# Altium PCB Master_V1.PcbDoc
Units mil, origin at the board's own origin, x right, y up, seen from the top; angles counter-clockwise.
Board outline 6000 x 4000 mil, 2 copper layers (Top Layer, Bottom Layer); 172 components, 130 nets, 630 pads, 0 vias.
Unrouted connection lines stored in the file: 409.
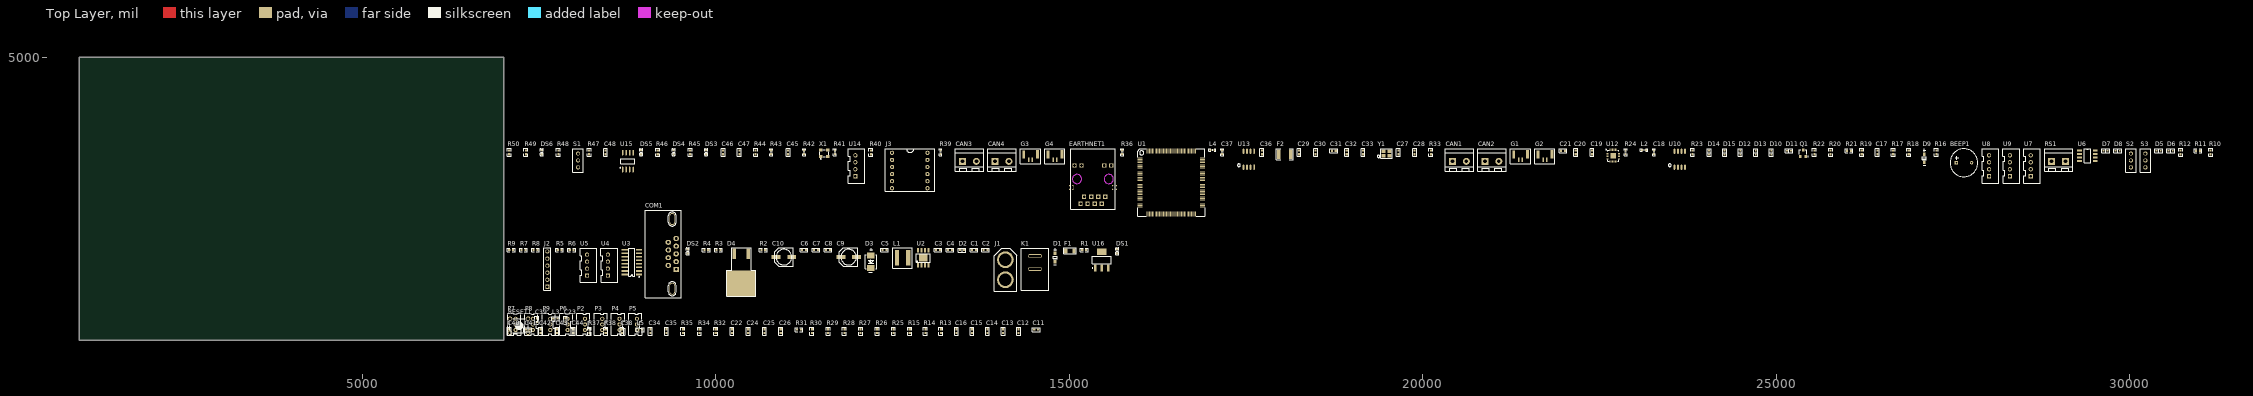
[diagram p0: Top Layer view]
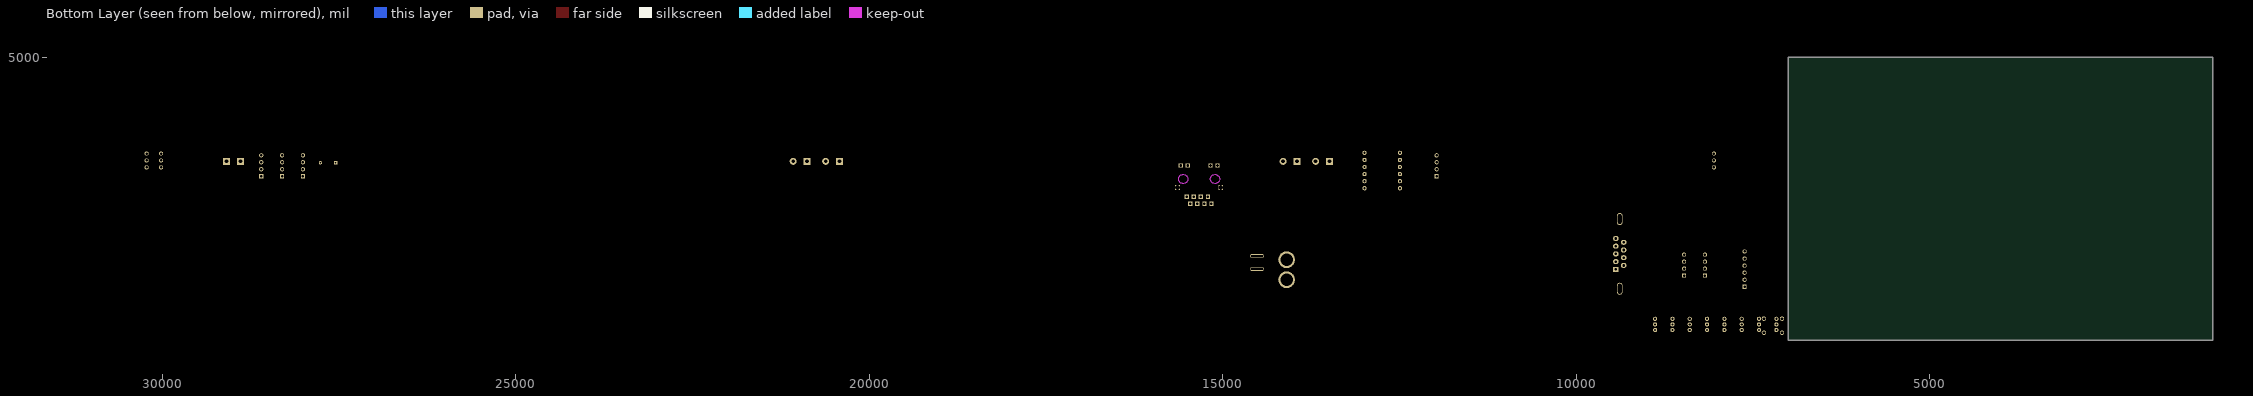
[diagram p1: Bottom Layer view, seen from below]

## Layer stack, top to bottom
Top Solder: solder mask 0.4, Solder Resist, Dk 3.5
Top Layer: signal copper 1.4
Dielectric 1: dielectric 12.6, FR-4, Dk 4.8
Bottom Layer: signal copper 1.4
Bottom Solder: solder mask 0.4, Solder Resist, Dk 3.5

## Board outline
1000,1000 7000,1000 7000,5000 1000,5000

## Design rules (kind name [scope] priority, off if disabled: settings)
Clearance [All] p1: gap=10 ignorepadtopadclearanceinfootprint=FALSE except(0: Arc-Hole Track-Hole SMDPad-Hole THPad-Hole Via-Hole Fill-Hole Poly-Hole Region-Hole Text-Hole)
PolygonConnect [All] p1: connectstyle=Relief reliefconductorwidth=10 reliefentries=4 polygonreliefangle="90 Angle" airgapwidth=10
RoutingVias [All] p1: holewidth=28 width=50 viastyle="Through Hole" minholewidth=28 minwidth=50 maxholewidth=28 maxwidth=50
SolderMaskExpansion [All] p1: expansion=4
Width [All] p1: maxlimit=10 minlimit=10 preferedwidth=10
30 further rules are at their usual default settings.

## Components (designator, comment, footprint, x,y, rotation, side; value= is the part's Value field where it differs from the comment)
BEEP1 "BEEP" BELL-5 27655,3510 r0 top
C1 "106" 0603C 13625,2275 r0 top
C2 "104" 0603C 13790,2275 r0 top
C3 "104" 0603C 13115,2275 r0 top
C4 "106" 0603C 13285,2275 r0 top
C5 "10nF" 0603C 12360,2275 r0 top
C6 "22uF" 0603C 11220,2275 r0 top
C7 "22uF" 0603C 11390,2275 r0 top
C8 "104" 0603C 11560,2275 r0 top
C9 "220uF" CC6.56.5 11880,2175 r0 top
C10 "220uF" CC6.56.5 10965,2175 r0 top
C11 "104pF" C0603 14505,1150 r0 top
C12 "104pF" C0603 14285,1100 r90 top
C13 "104pF" C0603 14065,1100 r90 top
C14 "104pF" C0603 13845,1100 r90 top
C15 "104pF" C0603 13625,1100 r90 top
C16 "104pF" C0603 13405,1100 r90 top
C17 "106" 0603C 26430,3630 r90 top
C18 "104" 0603P 23270,3660 r90 top
C19 "2.2uF 225M" 0603C 22395,3630 r90 top
C20 "104" 0603C 22165,3630 r90 top
C21 "2.2uF 225M" 0603C 21955,3680 r0 top
C22 "104pF" C0603 10230,1100 r90 top
C23 "10uF" 0603C 7875,1255 r90 top
C24 "104pF" C0603 10460,1100 r90 top
C25 "104pF" C0603 10690,1100 r90 top
C26 "104pF" C0603 10920,1100 r90 top
C27 "104" 0603C 19655,3630 r90 top
C28 "10uF" 0603C 19885,3630 r90 top
C29 "104" 0603C 18250,3630 r90 top
C30 "104" 0603C 18485,3630 r90 top
C31 "104" 0603C 18715,3680 r0 top
C32 "104" 0603C 18925,3630 r90 top
C33 "104" 0603C 19155,3630 r90 top
C34 "22pF" C0603 9075,1100 r90 top
C35 "22pF" C0603 9305,1100 r90 top
C36 "104" 0603C 17725,3630 r90 top
C37 "104" 0603P 17165,3660 r90 top
C38 "104pF" C0603 8675,1100 r90 top
C39 "10uF" 0603C 7470,1255 r90 top
C40 "223pF" C0603 7080,1100 r90 top
C41 "10pF" C0603 7315,1150 r0 top
C42 "10pF" C0603 7525,1100 r90 top
C43 "10pF" C0603 7755,1100 r90 top
C44 "10pF" C0603 7985,1100 r90 top
C45 "104" 0603C 11025,3630 r90 top
C46 "22pF" 0603C 10105,3630 r90 top
C47 "22pF" 0603C 10335,3630 r90 top
C48 "104" 0603C 8440,3630 r90 top
CAN1 "CAN" HEAD2L-0.8#1 20420,3530 r0 top
CAN2 "CAN" HEAD2L-0.8#1 20880,3530 r0 top
CAN3 "CAN" HEAD2L-0.8#1 13490,3530 r0 top
CAN4 "CAN" HEAD2L-0.8#1 13950,3530 r0 top
COM1 "USART_F(母头)" DB9 9440,2221 r90 top
D1 "RB161MM-20TR" LC-SOD-123F 14800,2170 r90 top
D2 "PESD5V0S1BB" LC-SOD-523 13485,2275 r0 top
D3 "SR54L" LC-SMB(DO-214AA)_S2 12195,2110 r90 top
D4 "STPS30M60S" STPS30M60S 10460,2225 r90 top
D5 "PESD5V0S1BB" LC-SOD-523 30410,3680 r0 top
D6 "PESD5V0S1BB" LC-SOD-523 30580,3680 r0 top
D7 "PESD5V0S1BB" LC-SOD-523 29660,3680 r0 top
D8 "PESD5V0S1BB" LC-SOD-523 29830,3680 r0 top
D9 "RB161MM-20TR" LC-SOD-123F 27095,3575 r90 top
D10 "PESD5V0S1BB" LC-SOD-523 24930,3655 r90 top
D11 "PESD5V0S1BB" LC-SOD-523 25180,3680 r0 top
D12 "PESD5V0S1BB" LC-SOD-523 24490,3655 r90 top
D13 "PESD5V0S1BB" LC-SOD-523 24710,3655 r90 top
D14 "PESD5V0S1BB" LC-SOD-523 24050,3655 r90 top
D15 "PESD5V0S1BB" LC-SOD-523 24270,3655 r90 top
DS1 "LED1" 0603_LED 15680,2255 r90 top
DS2 "LED0" 0603_LED 9605,2255 r90 top
DS3 "LED2" 0603_LED 9865,3660 r90 top
DS4 "LED0" 0603_LED 9405,3660 r90 top
DS5 "LED1" 0603_LED 8945,3660 r90 top
DS6 "LED2" 0603_LED 7540,3660 r90 top
EARTHNET1 "RJ45" HR911105A 15335,3280 r0 top
F1 "1A_6V_Fuse" LC-1206 15010,2265 r0 top
F2 "0.3A 60VPTC FUSE" LC-1812_R 18050,3630 r0 top
G1 "CAN-GH1.25" GH1.25_1*2_lishi 21285,3695 r0 top
G2 "CAN-GH1.25" GH1.25_1*2_lishi 21630,3695 r0 top
G3 "CAN-GH1.25" GH1.25_1*2_lishi 14355,3695 r0 top
G4 "CAN-GH1.25" GH1.25_1*2_lishi 14700,3695 r0 top
J1 "XT60" XT60-ĸͷ 13940,1690 r0 top
J2 "PS2接收器" HDR1X6 7620,1755 r90 top
J3 "JY901" JY901 12495,3650 r0 top
K1 "KEY10*15mm" 10*15mm船型开关 14515,2005 r90 top
L1 "XAL6060-103MEB" XAL6060-103MEB 12565,2165 r0 top
L2 "220R,2.0A,0.05DCR" 0603P 23130,3690 r0 top
L3 "220R,2.0A,0.05DCR" 0603C 7705,1305 r0 top
L4 "220R,2.0A,0.05DCR" 0603P 17025,3690 r0 top
L5 "220R,2.0A,0.05DCR" R0603 8905,1150 r0 top
P2 "PH2.0-3P" PH2.0-3 8150,1145 r90 top
P3 "PH2.0-3P" PH2.0-3 8395,1145 r90 top
P4 "PH2.0-3P" PH2.0-3 8640,1145 r90 top
P5 "PH2.0-3P" PH2.0-3 8885,1145 r90 top
P6 "PH2.0-3P" PH2.0-3 7905,1145 r90 top
P7 "PH2.0-3P" PH2.0-3 7170,1145 r90 top
P8 "PH2.0-3P" PH2.0-3 7415,1145 r90 top
P9 "PH2.0-3P" PH2.0-3 7660,1145 r90 top
Q1 "S8050" SOT-23R 25380,3640 r0 top
R1 "470R" 0603R 15185,2275 r0 top
R2 "1K" 0603R 10645,2275 r0 top
R3 "10K" 0603R 10010,2275 r0 top
R4 "3.24K" 0603R 9840,2275 r0 top
R5 "2.7K" 0603R 7765,2275 r0 top
R6 "2.7k" 0603R 7935,2275 r0 top
R7 "2.7K" 0603R 7255,2275 r0 top
R8 "2.7k" 0603R 7425,2275 r0 top
R9 "100R" 0603R 7080,2275 r0 top
R10 "100R" 0603R 31145,3630 r90 top
R11 "100R" 0603R 30940,3680 r0 top
R12 "100R" 0603R 30720,3630 r90 top
R13 "360R" R0603 13185,1100 r90 top
R14 "360R" R0603 12965,1100 r90 top
R15 "120R" R0603 12745,1100 r90 top
R16 "0603_100R" 0603R 27265,3630 r90 top
R17 "0603_100R" 0603R 26655,3630 r90 top
R18 "0603_100R" 0603R 26875,3630 r90 top
R19 "0603_100R" 0603R 26210,3630 r90 top
R20 "0603_100R" 0603R 25770,3630 r90 top
R21 "1K" 0603R 26000,3680 r0 top
R22 "0603_100R" 0603R 25540,3630 r90 top
R23 "10K" 0603R 23815,3630 r90 top
R24 "120R" 0603P 22870,3660 r90 top
R25 "510R" R0603 12515,1100 r90 top
R26 "49.9R" R0603 12285,1100 r90 top
R27 "49.9R" R0603 12050,1100 r90 top
R28 "49.9R" R0603 11820,1100 r90 top
R29 "49.9R" R0603 11590,1100 r90 top
R30 "10K" R0603 11360,1100 r90 top
R31 "10K" R0603 11150,1150 r0 top
R32 "10K" R0603 10000,1100 r90 top
R33 "10R" 0603R 20115,3630 r90 top
R34 "12.1K" R0603 9770,1100 r90 top
R35 "1M" R0603 9535,1100 r90 top
R36 "120R" 0603P 15750,3660 r90 top
R37 "510R" R0603 8215,1100 r90 top
R38 "510R" R0603 8445,1100 r90 top
R39 "4.7K" 0603P 13180,3660 r90 top
R40 "10K" 0603R 12195,3630 r90 top
R41 "4.7K" 0603P 11685,3660 r90 top
R42 "100R" 0603P 11250,3660 r90 top
R43 "100R" 0603P 10785,3660 r90 top
R44 "1M" 0603R 10565,3630 r90 top
R45 "1K" 0603R 9640,3630 r90 top
R46 "470R" 0603R 9180,3630 r90 top
R47 "470R" 0603R 8210,3630 r90 top
R48 "10K" 0603R 7775,3630 r90 top
R49 "10K" 0603R 7315,3630 r90 top
R50 "470R" 0603R 7080,3630 r90 top
RESET1 "KEY_M" KEY_M 7090,1305 r0 top
RS1 "RS485" HEAD2L-0.8#2 28895,3530 r0 top
S1 "SS-12D00开关" SS-12D00 8125,3375 r90 top
S2 "SS-12D00开关" SS-12D00 30090,3375 r90 top
S3 "SS-12D00开关" SS-12D00 30295,3375 r90 top
U1 "STM32F407ZGT6" lQFP144 16000,3575 r0 top
U2 "TPS5450DDAR" TPS5450 12860,2060 r0 top
U3 "SP3232" SOP16M 8815,2105 r90 top
U4 "IIC" XH2.54-4 8475,1915 r90 top
U5 "IIC" XH2.54-4 8180,1915 r90 top
U6 "SP3485" SOP-8 29290,3685 r0 top
U7 "串口通信" XH2.54-4 28600,3320 r90 top
U8 "串口通信" XH2.54-4 28010,3320 r90 top
U9 "串口通信" XH2.54-4 28305,3320 r90 top
U10 "TJA1050" SOP8 23635,3560 r0 top
U12 "LAN8720A" QFN25 22695,3610 r0 top
U13 "TJA1050" SOP8 17540,3560 r0 top
U14 "HEADER" XH2.54-4 11975,3320 r90 top
U15 "W25Q128" SOIC-8 8760,3530 r0 top
U16 "AMS1117-3.3" SOT223 15460,2135 r0 top
X1 "8M" "XTAL3225   无源" 11535,3645 r0 top
Y1 "25MHz" SMD-3225 19445,3675 r0 top

## Footprints (in the part's own frame and the unit in brackets; to place one, negate y for a bottom-side part, rotate by r counter-clockwise, add the part's x,y. Pads: shape width x height; smd on the part's side, far side on the other; paste and mask are expansions set on the pad)
10*15mm船型开关 [mm]
  oval 1.3x5 hole 0.5 slot 4.5 at 90 deg: 1(0,0) 2(4.75,0)
  silkscreen extent -7.5,-5 7.5,5
0603_LED [mil]
  rect 30x30 smd: 1(-29,0) 2(31,0)
  silkscreen extent -49,-20 51,20, body extent -40,-25 40,25, height 43
0603C [mil]
  rect 30x30 smd: 1(0,0) 2(55,0)
  silkscreen extent -27,-27 82,27, body extent -4,-16 59,16, height 12
0603P [mil]
  rect 30x30 smd: 1(-27,0) 2(27.5,-0.06)
  silkscreen extent -50,-20 50,20
0603R [mil]
  rect 30x30 smd: 1(0,0) 2(55,0)
  silkscreen extent -27,-27 82,27, body extent -4,-18 58,16, height 18
BELL-5 [mm]
  rect 1.2x1.2 hole 0.7: 1(-2.75,0)
  round 1.2 hole 0.7: 2(2.75,0)
  silkscreen extent -5,-5 5,5
C0603 [mil]
  rect 30x30 smd: 1(0,0) 2(55,0)
  silkscreen extent -27,-27 82,27, body extent -4,-16 59,16, height 12
CC6.56.5 [mm] "SMD;W:6.5mm;L:6.5mm;"
  rect 3.2x1.5 smd: 1(-2.794,0) 2(2.8,0)
  silkscreen extent -3.3,-3.3 3.3,3.3
DB9 [mil]
  oval 170x80 hole 50 slot 140 at 0 deg: 0(-493,55) 0(493,55)
  rect 70x80 hole 38: 1(-218,0)
  oval 70x80 hole 38: 2(-109,0) 3(0,0) 4(109,0) 5(218,0) 6(-163,110) 7(-54,110) 8(55,110) 9(164,110)
  silkscreen extent -618,-70 618,440
GH1.25_1*2_lishi [mm]
  rect 0.5x1.6 smd: 1(1.88,-3.683) 2(3.13,-3.683)
  rect 1x3 smd: ""(0.025,-1.753) ""(5.004,-1.676)
  silkscreen extent -1.14,-5.08 6.1,0.38
HDR1X6 [mm] "Connector; Header; 6 Position"
  rect 1.5x1.5 hole 0.9: 1(0,0)
  round 1.5 hole 0.9: 2(2.54,0) 3(5.08,0) 4(7.62,0) 5(10.16,0) 6(12.7,0)
  silkscreen extent -1.27,-1.27 13.97,1.27, body extent -1.27,-1.27 13.97,1.27, height 7.58
HEAD2L-0.8#1 [mm]
  rect 2.5x2.5 hole 1.35: 1(0,0)
  round 2.5 hole 1.35: 2(5,0)
  silkscreen extent -2.54,-3.56 7.62,4.44
HEAD2L-0.8#2 [mm] "10.16mm*10.16mm,pin:5.08mm"
  rect 2.5x2.5 hole 1.35: 1(0,0) 2(5,0)
  silkscreen extent -2.54,-3.56 7.62,4.44
HR911105A [mm] "NET_WORK"
  rect 1.524x1.524 hole 0.889: 1(4.45,-6.35) 2(3.18,-8.89) 3(1.91,-6.35) 4(0.64,-8.89) 5(-0.63,-6.35) 6(-1.9,-8.89) 7(-3.17,-6.35) 8(-4.44,-8.89)
  rect 1.5x1.5 hole 1.02: 9(6.6,4.9) 10(4.064,4.9) 11(-4.064,4.9) 12(-6.6,4.9)
  rect 1.7x1.7 hole 1.65: 13(7.75,-3.048) 14(-7.75,-3.048)
  Keep-Out Layer circle w0.051: c5.716,0 r1.65
  Keep-Out Layer circle w0.051: c-5.714,0 r1.65
  silkscreen extent -8,-10.92 8,10.92
JY901 [mil]
  round 60 hole 32: 1(0,0) 2(0,-100) 3(0,-200) 4(0,-300) 5(0,-400) 6(0,-500) 7(500,-500) 8(500,-400) 9(500,-300) 10(500,-200) 11(500,-100) 12(500,0)
  silkscreen extent -95,-545 605,55
KEY_M [mil]
  round 62 hole 38: 1(0,0) 1(255.91,0) 2(0,-200) 2(255.91,-200)
  silkscreen extent 0,-200 255,0
LC-1206 [mm]
  rect 1.13x1.8 smd: 1(-1.49,0) 2(1.49,0)
  silkscreen extent -2.29,-1.09 2.29,1.04
LC-1812_R [mm]
  rect 1.2x3.42 smd: 1(-2.15,0) 2(2.15,0)
  silkscreen extent -3.05,-2.01 3.05,2.01, body extent -2.25,-1.6 2.25,1.6, height 0.59
LC-SMB(DO-214AA)_S2 [mil]
  rect 85x107.99 smd: 1(87.01,0) 2(-87.01,0)
  silkscreen extent -149,-83 193,83
LC-SOD-123F [mm]
  rect 1.25x1 smd: 1(1.475,0) 2(-1.475,0)
  silkscreen extent -2.59,-0.7 3.35,0.7, body extent -1.9,-0.85 1.85,0.85, height 1.2
LC-SOD-523 [mm]
  rect 0.7x0.64 smd: 1(0.73,0) 2(-0.73,0)
  silkscreen extent -1.4,-0.74 1.4,0.71, body extent -0.8,-0.4 0.8,0.4, height 0.7
lQFP144 [mil]
  rect 70.87x10 smd: 1(-0.35,0.02) 2(-0.35,-19.66) 3(-0.35,-39.35) 4(-0.35,-59.03) 5(-0.35,-78.72) 6(-0.35,-98.4) 7(-0.35,-118.09) 8(-0.35,-137.77) 9(-0.35,-157.46) 10(-0.35,-177.14) 11(-0.35,-196.83) 12(-0.35,-216.51) 13(-0.35,-236.2) 14(-0.35,-255.88) 15(-0.35,-275.57) 16(-0.35,-295.25) 17(-0.35,-314.94) 18(-0.35,-334.62) 19(-0.35,-354.31) 20(-0.35,-373.99) 21(-0.35,-393.68) 22(-0.35,-413.36) 23(-0.35,-433.05) 24(-0.35,-452.73) 25(-0.35,-472.42) 26(-0.35,-492.1) 27(-0.35,-511.79) 28(-0.35,-531.47) 29(-0.35,-551.16) 30(-0.35,-570.84) 31(-0.35,-590.53) 32(-0.35,-610.21) 33(-0.35,-629.9) 34(-0.35,-649.58) 35(-0.35,-669.27) 36(-0.35,-688.95) 73(885.47,-688.95) 74(885.47,-669.27) 75(885.47,-649.58) 76(885.47,-629.9) 77(885.47,-610.21) 78(885.47,-590.53) 79(885.47,-570.84) 80(885.47,-551.16) 81(885.47,-531.47) 82(885.47,-511.79) 83(885.47,-492.1) 84(885.47,-472.42) 85(885.47,-452.73) 86(885.47,-433.05) 87(885.47,-413.36) 88(885.47,-393.68) 89(885.47,-373.99) 90(885.47,-354.31) 91(885.47,-334.62) 92(885.47,-314.94) 93(885.47,-295.25) 94(885.47,-275.57) 95(885.47,-255.88) 96(885.47,-236.2) 97(885.47,-216.51) 98(885.47,-196.83) 99(885.47,-177.14) 100(885.47,-157.46) 101(885.47,-137.77) 102(885.47,-118.09) 103(885.47,-98.4) 104(885.47,-78.72) 105(885.47,-59.03) 106(885.47,-39.35) 107(885.47,-19.66) 108(885.47,0.02)
  rect 10x70.87 smd: 37(98.07,-787.38) 38(117.76,-787.38) 39(137.44,-787.38) 40(157.13,-787.38) 41(176.81,-787.38) 42(196.5,-787.38) 43(216.18,-787.38) 44(235.87,-787.38) 45(255.55,-787.38) 46(275.24,-787.38) 47(294.92,-787.38) 48(314.61,-787.38) 49(334.29,-787.38) 50(353.98,-787.38) 51(373.66,-787.38) 52(393.35,-787.38) 53(413.03,-787.38) 54(432.72,-787.38) 55(452.4,-787.38) 56(472.09,-787.38) 57(491.77,-787.38) 58(511.46,-787.38) 59(531.14,-787.38) 60(550.83,-787.38) 61(570.51,-787.38) 62(590.2,-787.38) 63(609.88,-787.38) 64(629.57,-787.38) 65(649.25,-787.38) 66(668.94,-787.38) 67(688.62,-787.38) 68(708.31,-787.38) 69(727.99,-787.38) 70(747.68,-787.38) 71(767.36,-787.38) 72(787.05,-787.38) 109(787.05,98.45) 110(767.36,98.45) 111(747.68,98.45) 112(727.99,98.45) 113(708.31,98.45) 114(688.62,98.45) 115(668.94,98.45) 116(649.25,98.45) 117(629.57,98.45) 118(609.88,98.45) 119(590.2,98.45) 120(570.51,98.45) 121(550.83,98.45) 122(531.14,98.45) 123(511.46,98.45) 124(491.77,98.45) 125(472.09,98.45) 126(452.4,98.45) 127(432.72,98.45) 128(413.03,98.45) 129(393.35,98.45) 130(373.66,98.45) 131(353.98,98.45) 132(334.29,98.45) 133(314.61,98.45) 134(294.92,98.45) 135(275.24,98.45) 136(255.55,98.45) 137(235.87,98.45) 138(216.18,98.45) 139(196.5,98.45) 140(176.81,98.45) 141(157.13,98.45) 142(137.44,98.45) 143(117.76,98.45) 144(98.07,98.45)
  silkscreen extent -32,-819 917,130
PH2.0-3 [mm]
  round 1.5 hole 0.8: 1(0,0) 2(2,0) 3(4,0)
  silkscreen extent -1.95,-1.79 5.98,2.91, body extent -1.94,-1.68 5.96,2.82, height 6
QFN25 [mm]
  rect 0.8x0.25 smd: 1(-2.101,1.25) 2(-2.101,0.75) 3(-2.101,0.25) 4(-2.101,-0.25) 5(-2.101,-0.75) 6(-2.101,-1.25) 13(2.101,-1.25) 14(2.101,-0.75) 15(2.101,-0.25) 16(2.101,0.25) 17(2.101,0.75) 18(2.101,1.25)
  rect 0.25x0.8 smd: 7(-1.25,-2.101) 8(-0.75,-2.101) 9(-0.25,-2.101) 10(0.25,-2.101) 11(0.75,-2.101) 12(1.25,-2.101) 19(1.25,2.101) 20(0.75,2.101) 21(0.25,2.101) 22(-0.25,2.101) 23(-0.75,2.101) 24(-1.25,2.101)
  rect 2x2 smd paste+0: 25(0,0)
  silkscreen extent -2.66,-2 2,2.28
R0603 [mil]
  rect 30x30 smd: 1(0,0) 2(55,0)
  silkscreen extent -27,-27 82,27, body extent -4,-18 58,16, height 18
SMD-3225 [mm]
  rect 1.4x1.2 smd: 1(-0.025,-1.7) 2(2.175,-1.7) 3(2.175,0) 4(-0.025,0)
  silkscreen extent -2.22,-2.51 3.15,0.84
SOIC-8 [mil]
  oval 20x80 smd: 1(-77.09,-115.71) 2(-27.09,-115.71) 3(22.91,-115.71) 4(72.91,-115.71) 5(72.91,123.27) 6(22.91,123.27) 7(-27.09,123.27) 8(-77.09,123.27)
  silkscreen extent -115,-96 96,39, body extent -96,-113 96,123, height 67
SOP8 [mm]
  oval 0.6x1.9 smd: 1(-1.905,-2.858) 2(-0.635,-2.858) 3(0.635,-2.858) 4(1.905,-2.858) 5(1.905,2.858) 6(0.635,2.858) 7(-0.635,2.858) 8(-1.905,2.858)
  silkscreen extent -4.06,-2.67 -3.05,-1.65, body extent -2.49,-1.99 2.49,1.99, height 1.75
SOP16M [mm] "Small Outline; 16 Leads; Body Width 3.9 mm; Pitch 1.27 mm"
  rect 0.6x2.2 smd: 1(-4.445,-2.6) 2(-3.175,-2.6) 3(-1.905,-2.6) 4(-0.635,-2.6) 5(0.635,-2.6) 6(1.905,-2.6) 7(3.175,-2.6) 8(4.445,-2.6) 9(4.445,2.6) 10(3.175,2.6) 11(1.905,2.6) 12(0.635,2.6) 13(-0.635,2.6) 14(-1.905,2.6) 15(-3.175,2.6) 16(-4.445,2.6)
  silkscreen extent -5.42,-2.72 5,1.1
SOP-8 [mil]
  rect 65x25 smd: 1(0,0) 2(0,-50) 3(0,-100) 4(0,-150) 5(224.41,-150) 6(224.41,-100) 7(224.41,-50) 8(224.41,0)
  silkscreen extent 65,-175 159,25
SOT223 [mm]
  rect 1x2.4 smd: 1(-2.3,-2.9) 2(0,-2.9) 3(2.3,-2.9)
  rect 3.4x2.4 smd: 4(0,2.9)
  silkscreen extent -3.47,-3.02 3.35,1.3, body extent -3.35,-1.85 3.35,1.85, height 1.8
SOT-23R [mm] "SOT-23; 3 Leads; Body 3.0 x 2.5 mm, inc. leads (LxW max)"
  rect 0.9x0.95 smd: 1(0.95,-1.048) 2(-0.95,-1.048) 3(0,1.302)
  silkscreen extent -1.3,-1.19 1.93,1.3
SS-12D00 [mm]
  round 1.5 hole 0.9: 1(1.75,1.85) 2(4.25,1.85) 3(6.75,1.85)
  silkscreen extent 0,0 8.5,3.7
STPS30M60S [mm]
  rect 3.7x1.3 smd: 1(0,5.08) 1(0,0)
  rect 9.1x10.3 smd: 2(-10.6,2.54)
  silkscreen extent -15.24,-2.67 2.03,7.75
TPS5450 [mm]
  rect 0.6x1.55 smd: 1(0,0) 2(1.27,0) 3(2.54,0) 4(3.81,0) 5(3.81,5.4) 6(2.54,5.4) 7(1.27,5.4) 8(0,5.4)
  rect 3.1x2.6 smd: 9(1.905,2.667)
  silkscreen extent -0.6,1.14 4.41,4.18
XAL6060-103MEB [mm]
  rect 1.5x5.5 smd: 1(0,0) 2(4.04,0)
  silkscreen extent -1.52,-3.68 5.46,3.56
XH2.54-4 [mm]
  rect 1.5x1.5 hole 0.9: 1(0,0)
  round 1.5 hole 0.9: 2(2.5,0) 3(5,0) 4(7.5,0)
  silkscreen extent -2.49,-3.45 9.88,2.49, body extent -2.47,-3.38 9.93,2.37, height 7
XT60-ĸͷ [mm]
  round 6 hole 4.5: 1(4,4.2) 2(4,11.4)
  silkscreen extent 0,0 8.1,15.5
"XTAL3225   无源" [mil]
  rect 51.18x39.37 smd: 1(-48,-45.5) 2(48,-45.5) 3(48,45.5) 4(-48,45.5)
  silkscreen extent -65,-85 61,51

## Part data
C1 C2 C3 C4 C5 C6 C7 C8 C11 C12 C13 C14 C15 C16 C17 C18 C19 C21 C22 C23 C24 C25 C26 C27 C28 C29 C30 C31 C32 C33 C34 C35 C36 C37 C38 C39 C40 C41 C42 C43 C44 C45 C46 C47 C48: library part C
C9 C10: library part CAP
C20: library part C_1
CAN1 CAN2 CAN3 CAN4 RS1: library part HEAD2
COM1: library part DB9
D1 D3 D9: library part 肖特基
D2 D5 D6 D7 D8 D10 D11 D12 D13 D14 D15: library part SMAJ28CA
DS1 DS2 DS4 DS5: library part LED2, "Typical RED, GREEN, YELLOW, AMBER GaAs LED", PackageDocument=Feb-2002, LatestRevisionDate=17-Jul-2002, LatestRevisionNote="Re-released for DXP Platform.", PackageReference=3.2X1.6X1.1, Published=8-Jun-2000, Publisher="Altium Limited"
DS3 DS6: "Typical RED, GREEN, YELLOW, AMBER GaAs LED", PackageDocument=Feb-2002, LatestRevisionDate=17-Jul-2002, LatestRevisionNote="Re-released for DXP Platform.", PackageReference=3.2X1.6X1.1, Published=8-Jun-2000, Publisher="Altium Limited"
EARTHNET1: library part HR911105
F1 F2: library part "Fuse 1_2", "Fuse", LatestRevisionDate=17-Jul-2002, LatestRevisionNote="Re-released for DXP Platform.", PackageDescription="Thru-Hole; 2 Leads", PackageReference=PIN-W2/E2.8, Published=8-Jun-2000, Publisher="Altium Limited"
G1 G2 G3 G4: library part GH1.25-CAN
J1: library part KF2_5.08
J3: library part JY901-PAD
K1: library part 10*15船型开关
L1: library part 贴片电感
L2 L3 L4 L5: library part L
P2 P3 P4 P5 P6 P7 P8 P9: library part XH2.54插座-3P
Q1: library part NPN, "8050/BCW846/BCW847"
R1 R2 R3 R4 R13 R14 R15 R21 R23 R24 R25 R26 R27 R28 R29 R30 R31 R32 R33 R34 R35 R36 R37 R38 R39 R40 R41 R42 R43 R44 R45 R46 R47 R48 R49 R50: library part R
R5 R6 R7 R8 R9 R10 R11 R12: library part R-0805, "R-0805"
R16 R17 R18 R19 R20 R22: library part RES
S1 S2 S3: library part SS-12D00
U1: "ARM Cortex-M4 32b MCU+FPU, 210DMIP, 1024 kB Flash, 192+4 kB RAM, Camera, 114 I/Os, 144-pin LQFP, -40 to +85癈, Tray", Operating Frequency (Processor Speed)=168MHz, 16-bit Timers (IC/OC/PWM)=12x16-bit(24/24/30), 32-bit Timer (IC/OC/PWM)="2x32-bit (8/8/8)", A/D Converter=24x12-bit, ComponentLink1Description="Manufacturer URL", ComponentLink1URL=http://www.st.com/, ComponentLink2Description="STM32F405/7 Datasheet", ComponentLink2URL=http://www.st.com/internet/com/TECHNICAL_RESOURCES/TECHNICAL_LITERATURE/DATASHEET/DM00037051.pdf, ComponentLink3Description="STM32F4 Web Page", ComponentLink3URL=http://www.st.com/internet/mcu/subclass/1521.jsp, D/A Converter=2x12-bit, DatasheetVersion="rev2, Jan-2012", Internal RAM=192kB, Other Timer Functions="2xWDG, RTC, 24-bit down counter", PackageDescription="144-Pin Low Profile Quad Flat Package, 20x20 mm Body, 0.5 mm Pitch", PackageReference=TQFP144, PackageVersion=2012, Serial Interface="3xSPI/2xI2S/2xI2C/3xUSART(IrDa, ISO7816)/3xUART/2xUSB OTG FS/HS, 2xCAN/Ethernet MAC10/100, SDIO"
U2: library part TPS5450
U3: library part MAX3232
U4 U5 U7 U8 U9 U14: library part XH2.54插座-4P
U6: library part MAX3485
U10 U13: library part SN65HVD230D
U12: library part LAN8720, "ETH PHY"
U15: library part W25X16, "W25X16;SST25VF016;MX25L1605"
U16: library part AMS1117
X1: library part CRYSTAL, "Crystal"
Y1: library part XTAL, "Crystal Oscillator", LatestRevisionDate=17-Jul-2002, LatestRevisionNote="Re-released for DXP Platform.", Published=8-Jun-2000, Publisher="Altium Limited"

## Nets (pads, with @x,y where several pads share a name; then routed paths per layer and width w, separated by ;. In a path a pad name is that pad's centre, name@x,y a point inside that pad or via, vN(x,y) a via of type N, cw(c..) or ccw(c..) an arc to the next point about the centre after c; other vN are vias at no path point)
BEEP: R21.1 U1.90
BOOT0: R48.1 U1.138
BOOT1: R49.1 U1.48
CAN1_H: CAN3.2 CAN4.2 G3.2 G4.2 R24.2 R36.2 U10.7 U13.7
CAN1_L: CAN3.1 CAN4.1 G3.1 G4.1 R24.1 R36.1 U10.6 U13.6
CAN1_RX: U1.103 U10.4
CAN1_TX: U1.104 U10.1
CAN2_H: CAN1.2 CAN2.2 G1.2 G2.2
CAN2_L: CAN1.1 CAN2.1 G1.1 G2.1
CAN2_RX: U1.73 U13.4
CAN2_TX: U1.74 U13.1
ETH_MDC: U1.27 U12.13
ETH_MDIO: R25.1 U1.36
ETH_RESET: R32.2 U1.117 U12.15
F_CS: U1.75 U15.1
GND: C1.2 C2.2 C3.2 C4.2 C6.1 C7.1 C8.2 C9.2 C10.2 C11.2 C13.1 C15.1 C16.2 C17.2 C18.2 C19.1 C20.1 C21.2 C22.1 C23.1 C24.1 C25.1 C26.1 C27.1 C28.1 C29.1 C30.1 C31.1 C32.1 C33.1 C34.1 C35.1 C36.1 C37.2 C38.1 C39.1 C40.1 C41.1 C42.1 C43.1 C44.1 C45.2 C46.1 C47.1 C48.2 COM1.5 D2.1 D4.1 D5.1 D6.1 D7.1 D8.1 D10.1 D11.1 D12.1 D13.1 D14.1 D15.1 DS1.2 DS2.2 EARTHNET1.8 EARTHNET1.13 EARTHNET1.14 J1.2 J2.6 J3.5 J3.8 P2.2 P3.2 P4.2 P5.2 P6.2 P7.2 P8.2 P9.2 Q1.1 R4.2 R13.2 R23.2 R30.2 R31.2 R32.1 R34.1 R37.1 R38.1 R45.2 R48.2 RESET1.2 S1.3 U1.16 U1.31 U1.38 U1.51 U1.61 U1.83 U1.94 U1.107 U1.120 U1.130 U2.6 U2.9 U3.15 U4.2 U5.2 U6.5 U7.2 U8.2 U9.2 U10.2 U10.8 U12.25 U13.2 U13.8 U14.2 U15.4 U16.1 X1.2 X1.4 Y1.2 Y1.4
I2C1_SCL: R10.2 U1.139
I2C1_SDA: R12.2 U1.140
I2C2_SCL: R9.2 U1.11
I2C2_SDA: R11.2 U1.10
I2C3_SCL: J3.10 R41.1 U1.100
I2C3_SDA: J3.9 R39.1 U1.99
LED0: R46.2 U1.87
LED1: R47.2 U1.88
LED2: R50.2 U1.89
LINK_LED: EARTHNET1.12 R30.1 U12.3
NetBEEP1_2: BEEP1.2 D9.1 Q1.3
NetC1_1: C1.1 C2.1 F1.2 U16.2 U16.4
NetC3_1: C3.1 C4.1 D1.2 U16.3
NetC5_1: C5.1 D4.2 L1.1 U2.8
NetC5_2: C5.2 U2.1
NetC6_2: C6.2 C7.2 C8.1 D3.2 U2.7
NetC12_1: C12.1 U3.1
NetC12_2: C12.2 U3.3
NetC13_2: C13.2 U3.2
NetC14_1: C14.1 U3.5
NetC14_2: C14.2 U3.4
NetC15_2: C15.2 U3.6
NetC18_1: C18.1 L2.1 U10.3
NetC19_2: C19.2 U1.71
NetC21_1: C21.1 U1.106
NetC22_2: C22.2 C23.2 U12.6
NetC27_2: C27.2 C28.2 R33.2 U1.33
NetC34_2: C34.2 R35.1 U12.4 Y1.1
NetC35_2: C35.2 R35.2 U12.5 Y1.3
NetC37_1: C37.1 L4.1 U13.3
NetCOM1_2: COM1.2 U3.14
NetCOM1_3: COM1.3 U3.13
NetD5_2: D5.2 R5.1 R9.1 U4.3
NetD6_2: D6.2 R6.1 R11.1 U4.4
NetD7_2: D7.2 R7.1 R10.1 U5.3
NetD8_2: D8.2 R8.1 R12.1 U5.4
NetDS1_1: DS1.1 R1.2
NetDS2_1: DS2.1 R2.1
NetDS3_2: DS3.2 R45.1
NetDS4_2: DS4.2 R46.1
NetDS5_2: DS5.2 R47.1
NetDS6_2: DS6.2 R50.1
NetEARTHNET1_10: EARTHNET1.10 R37.2
NetEARTHNET1_11: EARTHNET1.11 R38.2
NetF2_1: F2.1 L3.1
NetJ1_1: J1.1 K1.1
NetQ1_2: Q1.2 R21.2 R23.1
NetR3_1: R3.1 R4.1 U2.4
NetR13_1: R13.1 R15.1 RS1.2 U6.7
NetR14_1: R14.1 R15.2 RS1.1 U6.6
NetR16_2: R16.2 U7.3
NetR17_2: R17.2 U8.3
NetR18_2: R18.2 U9.3
NetR19_2: R19.2 U9.4
NetR20_2: R20.2 U7.4
NetR22_2: R22.2 U8.4
NetR25_2: R25.2 U12.12
NetR34_2: R34.2 U12.24
NetR42_2: R42.2 U14.3
NetR43_2: R43.2 U14.4
NetR49_2: R49.2 S1.2
NRST: C45.1 R40.1 RESET1.1 U1.25
OSC_IN: C46.2 R44.1 U1.23 X1.1
OSC_OUT: C47.2 R44.2 U1.24 X1.3
PS2_CLK: J2.1 U1.41
PS2_CMD: J2.3 U1.40
PS2_CS: J2.2 U1.37
PS2_DAT: J2.4 U1.42
RMII_CRS_DV: U1.43 U12.11
RMII_REF_CLK: U1.35 U12.14
RMII_RXD0: U1.44 U12.8
RMII_RXD1: U1.45 U12.7
RMII_TX_EN: U1.126 U12.16
RMII_TXD0: U1.128 U12.17
RMII_TXD1: U1.129 U12.18
RS485_RE: U1.93 U6.2 U6.3
RS485_RX: S2.3 U6.4
RS485_TX: S3.3 U6.1
SPEED_LED: EARTHNET1.9 R31.1 U12.2
SPI3_MISO: U1.134 U15.2
SPI3_MOSI: U1.135 U15.5
SPI3_SCK: U1.133 U15.6
SWCLK: R43.1 U1.109
SWDIO: R42.1 U1.105
T1_C1: P2.3 U1.60
T1_C2: P7.3 U1.64
T1_C3: P3.3 U1.66
T1_C4: P8.3 U1.67
T4_C1: P4.3 U1.81
T4_C2: P9.3 U1.82
T4_C3: P5.3 U1.85
T4_C4: P6.3 U1.86
TPRX+: C43.2 EARTHNET1.3 R28.1 U12.23
TPRX-: C44.2 EARTHNET1.6 R29.1 U12.22
TPTX+: C41.2 EARTHNET1.1 R26.1 U12.21
TPTX-: C42.2 EARTHNET1.2 R27.1 U12.20
U2_RX: D13.2 R22.1 U1.122
U2_TX: D12.2 R17.1 U1.119
U3_RX: S2.1 U3.11
U3_TX: S3.1 U3.12
U4_RX: J3.4 U1.112
U4_TX: J3.3 U1.111
U5_RX: D11.2 R20.1 U1.116
U5_TX: D10.2 R16.1 U1.113
U6_RX: D14.2 R19.1 U1.97
U6_TX: D15.2 R18.1 U1.96
USART3_RX: S3.2 U1.70
USART3_TX: S2.2 U1.69
VCC3.3_S: BEEP1.1 C11.1 C16.1 C17.1 D9.2 R14.2 U3.16 U6.8
VCC3.3E: C25.2 C26.2 C39.2 C40.2 EARTHNET1.4 EARTHNET1.5 L5.1 R26.2 R27.2 R28.2 R29.2 U12.1 U12.19
VCC_3.3V_MCU: C20.2 C29.2 C30.2 C31.2 C32.2 C33.2 C36.2 DS3.1 F2.2 R33.1 U1.6 U1.17 U1.30 U1.32 U1.39 U1.52 U1.62 U1.72 U1.84 U1.95 U1.108 U1.121 U1.131 U1.143 U1.144
VCC_3.3V_S: C24.2 C38.2 C48.1 D2.2 DS4.1 DS5.1 DS6.1 F1.1 J3.2 J3.11 L3.2 L5.2 R1.1 R39.2 R40.2 R41.2 S1.1 U12.9 U14.1 U15.3 U15.7 U15.8
VCC_5V_U: C9.1 C10.1 D1.1 J2.5 L1.2 L2.2 L4.2 P2.1 P3.1 P4.1 P5.1 P6.1 P7.1 P8.1 P9.1 R2.2 R3.2 R5.2 R6.2 R7.2 R8.2 U4.1 U5.1 U7.1 U8.1 U9.1
VCC_INPUT: D3.1 K1.2
pads on no net: COM1.0 COM1.1 COM1.4 COM1.6 COM1.7 COM1.8 COM1.9 EARTHNET1.7 G1. G2. G3. G4. J3.1 J3.6 J3.7 J3.12 U1.1 U1.2 U1.3 U1.4 U1.5 U1.7 U1.8 U1.9 U1.12 U1.13 U1.14 U1.15 U1.18 U1.19 U1.20 U1.21 U1.22 U1.26 U1.28 U1.29 U1.34 U1.46 U1.47 U1.49 U1.50 U1.53 U1.54 U1.55 U1.56 U1.57 U1.58 U1.59 U1.63 U1.65 U1.68 U1.76 U1.77 U1.78 U1.79 U1.80 U1.91 U1.92 U1.98 U1.101 U1.102 U1.110 U1.114 U1.115 U1.118 U1.123 U1.124 U1.125 U1.127 U1.132 U1.136 U1.137 U1.141 U1.142 U2.2 U2.3 U2.5 U3.7 U3.8 U3.9 U3.10 U10.5 U12.10 U13.5